# Altium PCB MB.PcbDoc
Units mm, origin at the board's own origin, x right, y up, seen from the top; angles counter-clockwise.
Board outline 160 x 154 mm, 2 copper layers (Top Layer, Bottom Layer); 49 components, 74 nets, 365 pads, 12 vias.
Unrouted connection lines stored in the file: 115.
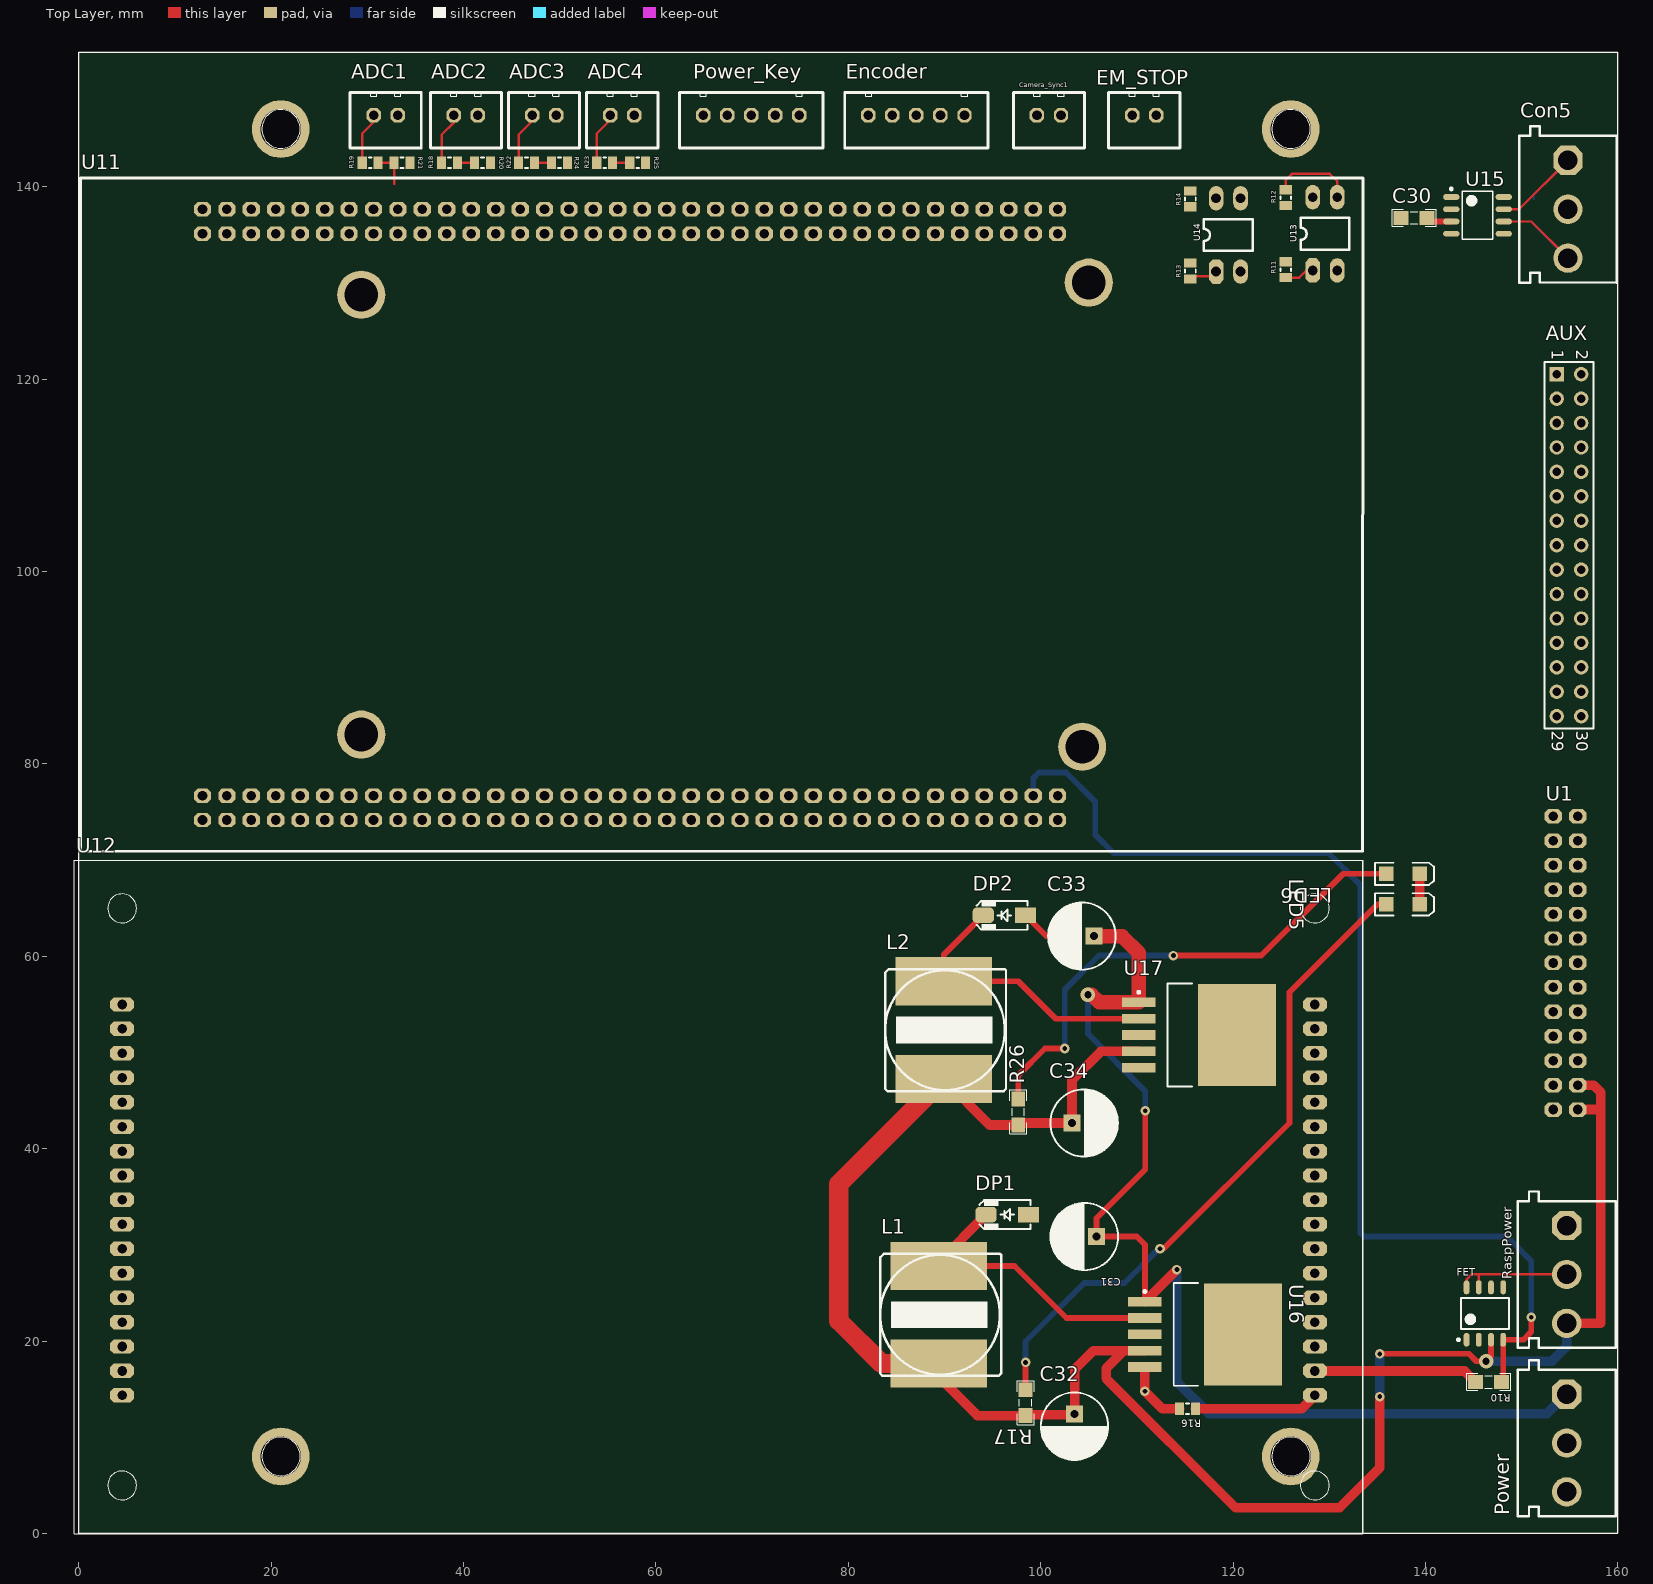
[diagram p0: Top Layer view]
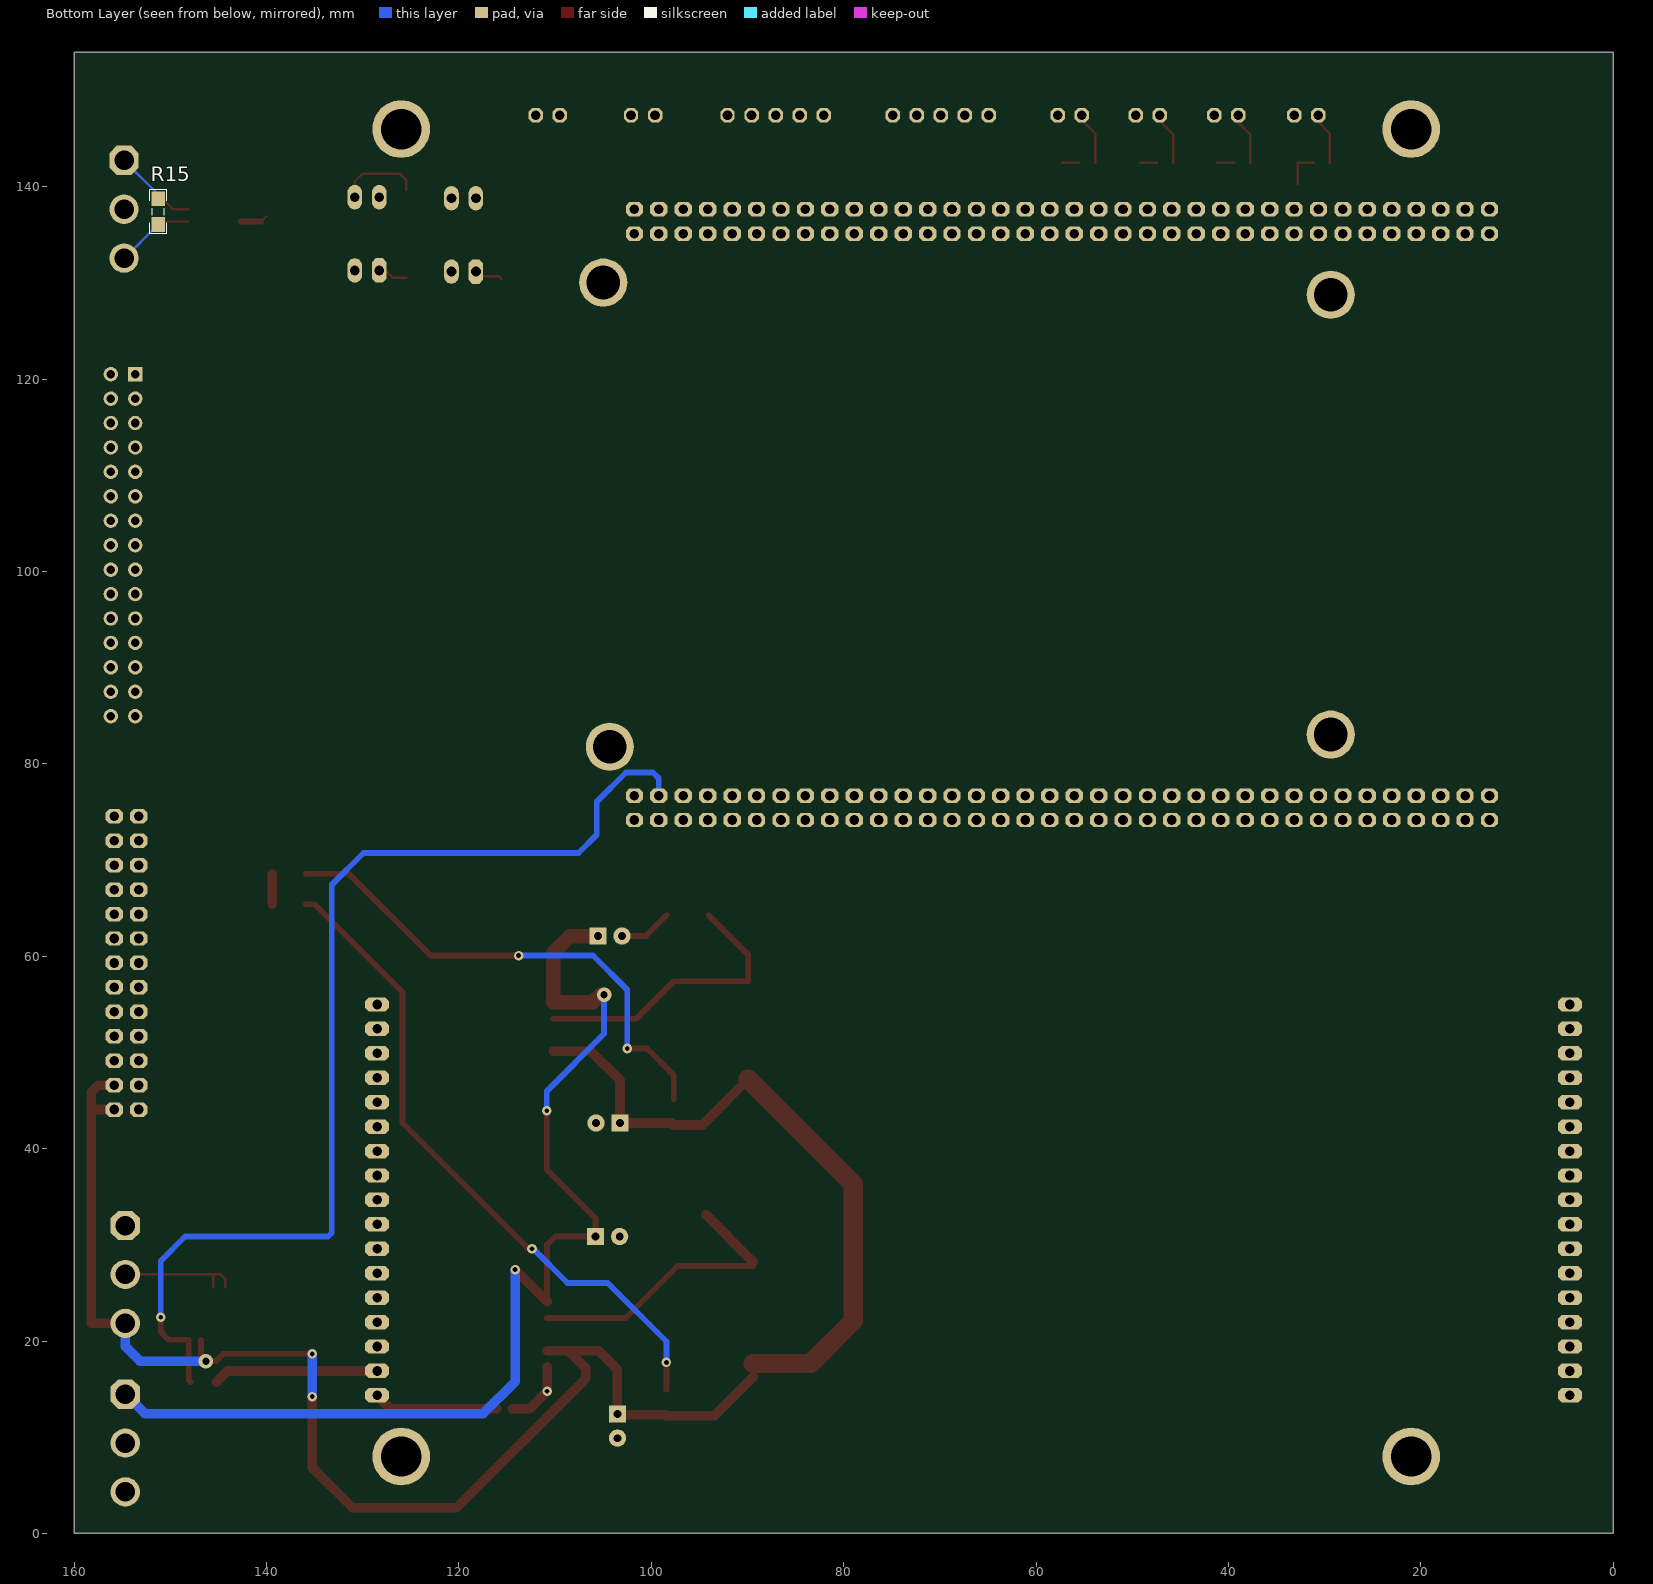
[diagram p1: Bottom Layer view, seen from below]

## Layer stack, top to bottom
Top Solder: solder mask 0.0102, Solder Resist, Dk 3.5
Top Layer: signal copper 0.0356
Dielectric 1: dielectric 0.32, FR-4, Dk 4.8
Bottom Layer: signal copper 0.0356
Bottom Solder: solder mask 0.0102, Solder Resist, Dk 3.5

## Board outline
0.013,0.013 0.013,154.013 160.013,154.013 160.013,0.013

## Design rules (kind name [scope] priority, off if disabled: settings)
Clearance [All] p1: gap=0.254 ignorepadtopadclearanceinfootprint=FALSE except(0: Arc-Hole Track-Hole SMDPad-Hole THPad-Hole Via-Hole Fill-Hole Poly-Hole Region-Hole Text-Hole)
ComponentClearance [All] p1: gap=0 collisioncheckmode=3 verticalgap=2540 showdistances=FALSE
PolygonConnect [All] p1: connectstyle=Relief reliefconductorwidth=0.254 reliefentries=4 polygonreliefangle="90 Angle" airgapwidth=0.254
RoutingVias [All] p1: holewidth=0.711 width=1.27 viastyle="Through Hole" minholewidth=0.711 minwidth=1.27 maxholewidth=0.711 maxwidth=1.27
SolderMaskExpansion [All] p1: expansion=0.102
Width [All] p1: maxlimit=3 minlimit=0.254 preferedwidth=0.254
29 further rules are at their usual default settings.

## Components (designator, comment, footprint, x,y, rotation, side; value= is the part's Value field where it differs from the comment)
ADC1 "XH_2PIN" XH_2PIN 35.597,149.797 r180 top
ADC2 "XH_2PIN" XH_2PIN 43.939,149.797 r180 top
ADC3 "XH_2PIN" XH_2PIN 52.067,149.797 r180 top
ADC4 "XH_2PIN" XH_2PIN 60.195,149.797 r180 top
AUX "Header 15X2" HDR2X15 153.649,120.523 r270 top
C30 "0.1uF" CAPC3413X12N 138.811,136.779 r0 top
C31 "100uF50V" "Cap electrolitic radial 6x7-2.5" 104.541,30.861 r180 top
C32 "100uF50V" "Cap electrolitic radial 6x7-2.5" 103.505,11.156 r270 top
C33 "100uF50V" "Cap electrolitic radial 6x7-2.5" 104.287,62.103 r180 top
C34 "100uF50V" "Cap electrolitic radial 6x7-2.5" 104.501,42.672 r0 top
Camera_Sync1 "XH_2PIN" XH_2PIN 104.558,149.797 r180 top
Con5 "CON3 pin Green" My_CN3 159.906,145.275 r270 top
DP1 "1N5819" 430X270D 96.52,33.147 r180 top
DP2 "1N5819" 430X270D 96.225,64.262 r180 top
EM_STOP "XH_2PIN" XH_2PIN 114.464,149.797 r180 top
Encoder "XH_5PIN" XH_5PIN 94.525,149.797 r180 top
FET "FET_20V_6A" FET_20V_6A 146.177,22.86 r90 top
L1 "Inductor" _INDUCTOR-SMD-13.0mm 89.535,22.733 r270 top value=10uH
L2 "Inductor" _INDUCTOR-SMD-13.0mm 90.043,52.324 r270 top value=10uH
LED5 "Red" "LED SMD 1206" 137.668,65.405 r0 top
LED6 "Red" "LED SMD 1206" 137.668,68.58 r0 top
Power "CON3 pin Green" My_CN3 159.779,17.005 r270 top (schematic designator Con6)
Power_Key "XH_5PIN" XH_5PIN 77.347,149.797 r180 top
R10 "1K" RESC3413X04N 146.558,15.748 r0 top
R11 "470" "RES 0805 (2012X06L)" 125.476,130.556 r90 top
R12 "4.7k" "RES 0805 (2012X06L)" 125.476,139.699 r270 top
R13 "470" "RES 0805 (2012X06L)" 115.57,130.43 r90 top
R14 "4.7k" "RES 0805 (2012X06L)" 115.57,139.572 r270 top
R15 "120" RESC3413X04N 151.257,137.414 r90 bottom
R16 "4.7k" "RES 0805 (2012X06L)" 116.078,12.954 r180 top
R17 "1K" RESC3413X04N 98.425,13.589 r270 top
R18 "470" "RES 0805 (2012X06L)" 39.37,142.494 r180 top
R19 "470" "RES 0805 (2012X06L)" 31.114,142.494 r180 top
R20 "470" "RES 0805 (2012X06L)" 42.798,142.494 r180 top
R21 "470" "RES 0805 (2012X06L)" 34.417,142.494 r180 top
R22 "470" "RES 0805 (2012X06L)" 47.371,142.494 r180 top
R23 "470" "RES 0805 (2012X06L)" 55.498,142.494 r180 top
R24 "470" "RES 0805 (2012X06L)" 50.799,142.494 r180 top
R25 "470" "RES 0805 (2012X06L)" 58.928,142.494 r180 top
R26 "1K" RESC3413X04N 97.663,43.815 r270 top
RaspPower "CON3 pin Green" My_CN3 159.779,34.531 r270 top (schematic designator Con?)
U1 "5Inch_HDMI_DISPLAY" 5Inch_HDMI_DISPLAY 155.821,44.069 r90 top
U11 "F7" F7 0.247,140.793 r270 top locked
U12 "CAN_CARD" CAN_CARD 133.505,69.991 r180 top locked
U13 "Optoisolator" My_opto 128.27,131.318 r90 top
U14 "Optoisolator" My_opto 118.224,131.204 r90 top
U15 "TJA1051" SO-8N 145.415,137.033 r0 top
U16 "5V" _TO263 117.081,20.701 r0 top
U17 "5V" _TO263 116.446,51.816 r0 top

## Footprints (in the part's own frame and the unit in brackets; to place one, negate y for a bottom-side part, rotate by r counter-clockwise, add the part's x,y. Pads: shape width x height; smd on the part's side, far side on the other; paste and mask are expansions set on the pad)
5Inch_HDMI_DISPLAY [mm]
  oct 1.5x1.8 hole 1: 1(0,0) 2(2.54,0) 3(5.08,0) 4(7.62,0) 5(10.16,0) 6(12.7,0) 7(15.24,0) 8(17.78,0) 9(20.32,0) 10(22.86,0) 11(25.4,0) 12(27.94,0) 13(30.48,0) 14(0,2.54) 15(2.54,2.54) 16(5.08,2.54) 17(7.62,2.54) 18(10.16,2.54) 19(12.7,2.54) 20(15.24,2.54) 21(17.78,2.54) 22(20.32,2.54) 23(22.86,2.54) 24(25.4,2.54) 25(27.94,2.54) 26(30.48,2.54)
430X270D [mm] "SMA Molded Diode, 2-Leads, Body 4.3x2.7mm"
  rect 2.2x1.6 smd: 1(-2.2,0)
  rrect50% 2.2x1.6 smd: 2(2.2,0)
  silkscreen extent -2.4,-1.5 2.9,1.5, body extent -2.75,-1.4 2.75,1.4, height 2.6
_INDUCTOR-SMD-13.0mm [mm]
  rect 5x10 smd: 1(-5.08,-0.127) 2(5.08,-0.127)
  silkscreen extent -6.35,-6.22 6.35,6.35
_TO263 [mm] "D2-PAK, 6-Leads, Body 8.9x10.2mm, Pitch 1.7mm, Lead Span 15.2mm, IPC High Density"
  rect 3.5x1 smd: 1(-6.25,3.4) 2(-6.25,1.7) 3(-6.25,0) 4(-6.25,-1.7) 5(-6.25,-3.4)
  rect 8.1x10.6 smd: 6(3.95,0)
  silkscreen extent -6.37,-5.35 -0.7,5.35
CAN_CARD [mm]
  oct 2.5x1.5 hole 1: 1(5,15) 2(5,17.54) 3(5,20.08) 4(5,22.62) 5(5,25.16) 6(5,27.7) 7(5,30.24) 8(5,32.78) 9(5,35.32) 10(5,37.86) 11(5,40.4) 12(5,42.94) 13(5,45.48) 14(5,48.02) 15(5,50.56) 16(5,53.1) 17(5,55.64) 18(129,15) 19(129,17.54) 20(129,20.08) 21(129,22.62) 22(129,25.16) 23(129,27.7) 24(129,30.24) 25(129,32.78) 26(129,35.32) 27(129,37.86) 28(129,40.4) 29(129,42.94) 30(129,45.48) 31(129,48.02) 32(129,50.56) 33(129,53.1) 34(129,55.64)
  silkscreen extent 0.01,0.01 134.01,70.01
"Cap electrolitic radial 6x7-2.5" [mm] "Cap electrolitic radial 6x7-2.5-Design:Abbas Basereh"
  rect 1.8x1.8 hole 0.8: 1(-1.25,0)
  round 1.8 hole 0.8: 2(1.25,0)
  silkscreen extent -3.5,-3.5 3.6,3.5, body extent -3,-3 3,3, height 7.3
CAPC3413X12N [mm] "Chip Capacitor, 2-Leads, Body 3/40x1/30mm, IPC Medium Density-Design:Abbas Basereh"
  rect 1.55x1.45 smd: 1(-1.35,0) 2(1.35,0)
  silkscreen extent -2.29,-0.89 2.29,0.89, body extent -1,-0.62 1,0.63, height 0.78
F7 [mm]
  oct 1.5x1.8 hole 1: 1(3.125,12.605) 2(5.665,12.605) 3(3.125,15.145) 4(5.665,15.145) 5(3.125,17.685) 6(5.665,17.685) 7(3.125,20.225) 8(5.665,20.225) 9(3.125,22.765) 10(5.665,22.765) 11(3.125,25.305) 12(5.665,25.305) 13(3.125,27.845) 14(5.665,27.845) 15(3.125,30.385) 16(5.665,30.385) 17(3.125,32.925) 18(5.665,32.925) 19(3.125,35.465) 20(5.665,35.465) 21(3.125,38.005) 22(5.665,38.005) 23(3.125,40.545) 24(5.665,40.545) 25(3.125,43.085) 26(5.665,43.085) 27(3.125,45.625) 28(5.665,45.625) 29(3.125,48.165) 30(5.665,48.165) 31(3.125,50.705) 32(5.665,50.705) 33(3.125,53.245) 34(5.665,53.245) 35(3.125,55.785) 36(5.665,55.785) 37(3.125,58.325) 38(5.665,58.325) 39(3.125,60.865) 40(5.665,60.865) 41(3.125,63.405) 42(5.665,63.405) 43(3.125,65.945) 44(5.665,65.945) 45(3.125,68.485) 46(5.665,68.485) 47(3.125,71.025) 48(5.665,71.025) 49(3.125,73.565) 50(5.665,73.565) 51(3.125,76.105) 52(5.665,76.105) 53(3.125,78.645) 54(5.665,78.645) 55(3.125,81.185) 56(5.665,81.185) 57(3.125,83.725) 58(5.665,83.725) 59(3.125,86.265) 60(5.665,86.265) 61(3.125,88.805) 62(5.665,88.805) 63(3.125,91.345) 64(5.665,91.345) 65(3.125,93.885) 66(5.665,93.885) 67(3.125,96.425) 68(5.665,96.425) 69(3.125,98.965) 70(5.665,98.965) 71(3.125,101.505) 72(5.665,101.505) 73(64.085,12.605) 74(66.625,12.605) 75(64.085,15.145) 76(66.625,15.145) 77(64.085,17.685) 78(66.625,17.685) 79(64.085,20.225) 80(66.625,20.225) 81(64.085,22.765) 82(66.625,22.765) 83(64.085,25.305) 84(66.625,25.305) 85(64.085,27.845) 86(66.625,27.845) 87(64.085,30.385) 88(66.625,30.385) 89(64.085,32.925) 90(66.625,32.925) 91(64.085,35.465) 92(66.625,35.465) 93(64.085,38.005) 94(66.625,38.005) 95(64.085,40.545) 96(66.625,40.545) 97(64.085,43.085) 98(66.625,43.085) 99(64.085,45.625) 100(66.625,45.625) 101(64.085,48.165) 102(66.625,48.165) 103(64.085,50.705) 104(66.625,50.705) 105(64.085,53.245) 106(66.625,53.245) 107(64.085,55.785) 108(66.625,55.785) 109(64.085,58.325) 110(66.625,58.325) 111(64.085,60.865) 112(66.625,60.865) 113(64.085,63.405) 114(66.625,63.405) 115(64.085,65.945) 116(66.625,65.945) 117(64.085,68.485) 118(66.625,68.485) 119(64.085,71.025) 120(66.625,71.025) 121(64.085,73.565) 122(66.625,73.565) 123(64.085,76.105) 124(66.625,76.105) 125(64.085,78.645) 126(66.625,78.645) 127(64.085,81.185) 128(66.625,81.185) 129(64.085,83.725) 130(66.625,83.725) 131(64.085,86.265) 132(66.625,86.265) 133(64.085,88.805) 134(66.625,88.805) 135(64.085,91.345) 136(66.625,91.345) 137(64.085,93.885) 138(66.625,93.885) 139(64.085,96.425) 140(66.625,96.425) 141(64.085,98.965) 142(66.625,98.965) 143(64.085,101.505) 144(66.625,101.505)
  round 5 hole 3.5: ""(10.745,104.745) ""(12.015,29.115) ""(57.735,29.115) ""(59.005,104.065)
  silkscreen extent -0.13,-0.1 69.88,133.24
FET_20V_6A [mm] "SOIC, 8-Leads, Body 4.89x3.90mm, Pitch 1.27mm, IPC Medium Density"
  oval 1.45x0.6 smd: 1(-2.725,1.905) 2(-2.725,0.635) 3(-2.725,-0.635) 4(-2.725,-1.905) 5(2.725,-1.905) 6(2.725,-0.635) 7(2.725,0.635) 8(2.725,1.905)
  silkscreen extent -2.85,-2.5 1.6,2.88, body extent -2,-2.5 2,2.5, height 1.75
HDR2X15 [mm] "Connector; Header; 15x2 Position"
  rect 1.5x1.5 hole 0.9: 1(0,0)
  round 1.5 hole 0.9: 2(0,2.54) 3(2.54,0) 4(2.54,2.54) 5(5.08,0) 6(5.08,2.54) 7(7.62,0) 8(7.62,2.54) 9(10.16,0) 10(10.16,2.54) 11(12.7,0) 12(12.7,2.54) 13(15.24,0) 14(15.24,2.54) 15(17.78,0) 16(17.78,2.54) 17(20.32,0) 18(20.32,2.54) 19(22.86,0) 20(22.86,2.54) 21(25.4,0) 22(25.4,2.54) 23(27.94,0) 24(27.94,2.54) 25(30.48,0) 26(30.48,2.54) 27(33.02,0) 28(33.02,2.54) 29(35.56,0) 30(35.56,2.54)
  silkscreen extent -1.27,-1.27 36.83,3.81
"LED SMD 1206" [mm]
  rect 1.5x1.5 smd: 1(-1.75,0) 2(1.75,0)
  silkscreen extent -2.9,-1.15 3.2,1.15, body extent -1.65,-0.76 1.65,0.69, height 1.36
My_CN3 [mil]
  oct 120x120 hole 80: 1(99.5,-200.5)
  round 120 hole 80: 2(299.5,-200.5) 3(499.5,-200.5)
  silkscreen extent -40,-400 600,0
My_opto [mil]
  oct 100x60 hole 40: 1(-0.5,-0.5)
  oval 100x60 hole 40: 2(-0.5,-100.5) 3(299.5,-0.5) 4(299.5,-100.5)
  silkscreen extent 84,-150 214,50
"RES 0805 (2012X06L)" [mm] "Chip Resistor, 2-Leads, Body 2.0x1.3mm, IPC High Density _ (0.100 W)"
  rect 0.95x1.3 smd: 1(0,0) 2(1.65,0)
  silkscreen extent 0.67,-0.55 0.97,0.55, body extent -0.19,-0.63 1.84,0.64, height 0.6
RESC3413X04N [mm] "Chip Resistor, 2-Leads, Body 3/40x1/30mm, IPC Medium Density-Design:Abbas Basereh"
  rect 1.55x1.45 smd: 1(-1.35,0) 2(1.35,0)
  silkscreen extent -2.29,-0.89 2.29,0.89, body extent -1.25,-0.62 1.25,0.62, height 0.79
SO-8N [mm] "SOIC, 8-Leads, Body 4/89x3/90mm, Pitch 1/27mm, IPC Medium Density designer:abbas basereh"
  oval 1.7x0.6 smd mask+0.06: 1(-2.725,1.905) 2(-2.725,0.635) 3(-2.725,-0.635) 4(-2.725,-1.905) 5(2.725,-1.905) 6(2.725,-0.635) 7(2.725,0.635) 8(2.725,1.905)
  silkscreen extent -2.85,-2.5 1.6,2.88, body extent -3,-2.5 3,2.5, height 1.5
XH_2PIN [mm]
  oct 1.5x1.5 hole 1: 1(2.45,2.35) 2(4.95,2.35)
  silkscreen extent 0,0 7.4,5.75
XH_5PIN [mm]
  oct 1.5x1.5 hole 1: 1(2.45,2.35) 2(4.95,2.35) 3(7.45,2.35) 4(9.95,2.35) 5(12.45,2.35)
  silkscreen extent 0,0 14.9,5.75

## Part data
AUX: "Header, 15-Pin, Dual row", LatestRevisionDate=17-Jul-2002, LatestRevisionNote="Re-released for DXP Platform.", Publisher="Altium Limited"
C30: library part "CAP SMD 0805", "CAP 0805", Data=16-12-2016, Desc.="CAP SMD 0805", Designer="Abbas Basereh"
C31 C32 C33 C34: library part "Cap ELECTROLITIC TOTAL SIZE", "Cap electrolitic radial", Data=16-12-2016, Designer="Abbas Basereh"
Con5 Power RaspPower: "Connector green screw"
DP1 DP2: "Schottkey Rectifiers", Data=16-12-2016, Designer="Abbas Basereh"
LED5 LED6: library part LED, "LED", Adding Date=1387/12/22, Color=Red, Designer="Saeid Jorablo", Organazation=ControTec, Size="SMD 1206"
R10 R15 R17 R26: library part "RES 0805 0.125W", "RES 0805", Data=16-12-2016, Desc.="RES SMD 0805", Designer="Abbas Basereh"
R11 R12 R13 R14 R16 R18 R19 R20 R21 R22 R23 R24 R25: library part Resistor, "Resistor"
U16 U17: library part LM2576, "Buck Step Down Regulator with 4.75 to 60 V Input and 15 V Output, -40 to 125 degC, 5-Pin DDPAK/TO-263 (KTT), Green (RoHS & no Sb/Br)"

## Free pads (board coordinates)
  round 6 hole 4.2: ""(21,8) ""(21,146) ""(126,8) ""(126,146)

## Via types
v1: diameter 1, hole 0.5, Top Layer to Bottom Layer, 10 vias
v2: diameter 1.5, hole 0.75, Top Layer to Bottom Layer, 2 vias

## Nets (pads, with @x,y where several pads share a name; then routed paths per layer and width w, separated by ;. In a path a pad name is that pad's centre, name@x,y a point inside that pad or via, vN(x,y) a via of type N, cw(c..) or ccw(c..) an arc to the next point about the centre after c; other vN are vias at no path point)
+5: C30.2 Encoder.3 R10.1 R16.1 U12.12 U12.13 U12.14 U12.15 U12.16 U12.17 U13.3 U14.3 U15.3 | length 33
  Top Layer w0.254: C30.2@140.034,136.906 C30.2 C30.2@140.542,136.398
  Top Layer w0.6: C30.2@140.542,136.398 U15.3
  Top Layer w1: R16.1 127.108,12.954 U12.17 ; U12.16 144.065,16.891 R10.1
+12V: C31.1 C33.1 Power.1 U16.1 U17.1 | length 116.3
  Top Layer w0.6: U16.1 110.831,30.012 109.982,30.861 C31.1 105.791,32.766 110.871,37.846 v1(110.871,43.942)
  Top Layer w1: U16.1 v1(114.162,27.432)
  Top Layer w1.5: v2(104.902,56.007) 105.283,56.007 106.074,55.216 U17.1 110.196,60.365 108.458,62.103 C33.1
  Bottom Layer w0.6: v2(104.902,56.007) 104.902,51.943 110.871,45.974 v1(110.871,43.942)
  Bottom Layer w1: v1(114.162,27.432) 114.162,15.759 117.475,12.446 152.654,12.446 Power.1
ADC1_IN0: R19.1 R21.2 U11.46 | length 3.8
  Top Layer w0.254: R19.1 R21.2 32.767,140.334
ADC1_IN3: R18.1 R20.2 U11.107 | length 1.8
  Top Layer w0.254: R18.1 R20.2
ADC1_IN9: R23.1 R25.2 U11.122 | length 1.8
  Top Layer w0.254: R23.1 R25.2
ADC1_IN10: R22.1 R24.2 U11.36 | length 1.8
  Top Layer w0.254: R22.1 R24.2
AUX_GPIO1: AUX.13 U11.142
AUX_GPIO2: AUX.14 U11.143
AUX_GPIO3: AUX.15 U11.144
AUX_GPIO4: AUX.16 U11.125
AUX_GPIO5: AUX.17 U11.32
AUX_GPIO6: AUX.18 U11.30
BL_EN: FET.4 R10.2 U11.141 | length 113.2
  Top Layer w0.6: R10.2 148.082,15.922 FET.4 150.183,20.135 151.003,20.955 v1(151.003,22.479)
  Bottom Layer w0.6: U11.141 99.212,78.511 99.822,79.121 102.616,79.121 105.664,76.073 105.664,72.644 107.569,70.739 129.921,70.739 133.223,67.437 133.223,31.242 133.604,30.861 148.463,30.861 151.003,28.321 v1(151.003,22.479)
BL_PW: FET.7 FET.8 RaspPower.2 | length 12.8
  Top Layer w0.254: FET.8 144.272,26.416 144.78,26.924 145.542,26.924 ; FET.7 145.542,26.924 ; RaspPower.2 145.542,26.924
CAM_SYNC: R14.1 U11.33 U14.4
CAN1_RX: U11.15 U15.4
CAN1_TX: U11.17 U15.1
CS1: U11.97 U12.21
CS2: U11.96 U12.20
CS3: U11.85 U12.19
CS4: U11.108 U12.18
EM_STOP: R12.1 U11.16 U13.4 | length 8.6
  Top Layer w0.254: R12.1 125.476,140.716 126.111,141.351 130.048,141.351 130.823,140.576 U13.4
GND: ADC1.1 ADC2.1 ADC3.1 ADC4.1 AUX.23 AUX.25 AUX.27 AUX.29 C30.1 C31.2 C32.2 C33.2 C34.2 Con5.2 DP1.1 DP2.1 Encoder.1 Encoder.2 LED5.2 LED6.2 pad.@126,146 Power.2 Power_Key.1 R12.2 R14.2 R20.1 R21.1 R24.1 R25.1 RaspPower.1 U1.3 U1.7 U1.10 U1.18 U1.26 U12.5 U12.6 U12.7 U12.8 U12.9 U12.10 U15.2 U16.3 U16.6 U17.3 U17.5 U17.6 | length 8.7
  Top Layer w0.6: DP2.1 100.584,62.103 C33.2
  Top Layer w1: LED5.2 LED6.2
I2C_SCL: AUX.19 U11.21
I2C_SDA: AUX.20 U11.19
NetADC1_2: ADC1.2 R19.2 | length 5.4
  Top Layer w0.254: R19.2 29.464,145.542 30.607,146.685 30.607,147.407 ADC1.2
NetADC2_2: ADC2.2 R18.2 | length 5.5
  Top Layer w0.254: R18.2 37.72,145.416 38.989,146.685 ADC2.2
NetADC3_2: ADC3.2 R22.2 | length 5.5
  Top Layer w0.254: R22.2 45.721,145.416 47.117,146.812 ADC3.2
NetADC4_2: ADC4.2 R23.2 | length 5.5
  Top Layer w0.254: R23.2 53.848,145.542 55.245,146.939 ADC4.2
NetCamera_Sync1_1: Camera_Sync1.1 R13.2
NetCamera_Sync1_2: Camera_Sync1.2 U14.2
NetCon5_1: Con5.1 R15.2 U15.7 | length 14.2
  Top Layer w0.254: U15.7 149.733,137.668 Con5.1
  Bottom Layer w0.254: R15.2 151.257,139.192 Con5.1
NetCon5_3: Con5.3 R15.1 U15.6 | length 13.2
  Top Layer w0.254: U15.6 151.003,136.398 Con5.3
  Bottom Layer w0.254: R15.1 154.733,132.588 Con5.3
NetDP1_2: DP1.2 L1.1 U16.2 | length 31
  Top Layer w0.6: L1.1@89.408,28.235 L1.1 97.282,27.813 102.694,22.401 U16.2
  Top Layer w1: L1.1@89.408,28.235 DP1.2
NetDP2_2: DP2.2 L2.1 U17.2 | length 30.5
  Top Layer w0.6: DP2.2 89.916,60.153 L2.1 97.663,57.404 101.551,53.516 U17.2
NetEM_STOP_1: EM_STOP.1 R11.2
NetEM_STOP_2: EM_STOP.2 U13.2
NetLED5_1: LED5.1 R17.1 | length 69.3
  Top Layer w0.6: R17.1 v1(98.425,17.78) ; v1(112.395,29.591) 112.776,29.591 125.857,42.672 125.857,56.261 135.001,65.405 LED5.1
  Bottom Layer w0.6: v1(98.425,17.78) 98.425,19.939 104.521,26.035 108.712,26.035 112.268,29.591 v1(112.395,29.591)
NetLED6_1: LED6.1 R26.1 | length 53
  Top Layer w0.6: R26.1 97.663,47.625 100.457,50.419 v1(102.489,50.419) ; v1(113.792,60.071) 122.936,60.071 131.445,68.58 LED6.1
  Bottom Layer w0.6: v1(102.489,50.419) 102.489,56.515 106.045,60.071 v1(113.792,60.071)
NetR11_1: R11.1 U13.1 | length 3.1
  Top Layer w0.254: R11.1 126.873,130.556 127.622,131.305 U13.1
NetR13_1: R13.1 U14.1 | length 3
  Top Layer w0.254: R13.1 115.823,130.683 117.729,130.683 U14.1
RPi_5V: AUX.24 AUX.26 AUX.28 AUX.30 C32.1 C34.1 FET.3 L1.2 L2.2 Power_Key.2 R17.2 R26.2 RaspPower.3 U1.1 U1.2 U16.4 U17.4 | length 209.2
  Top Layer w0.6: L1.2@89.408,16.256 L1.2 ; R26.2 R26.2@97.87,42.672 ; R17.2 R17.2@98.505,12.319 ; v1(135.255,18.669) 144.526,18.669 145.288,17.907 v2(146.304,17.907) 146.812,18.415 FET.3
  Top Layer w1: L1.2@89.408,16.256 93.425,12.239 R17.2 ; L2.2 94.695,42.465 R26.2 ; R26.2@97.87,42.672 C34.1 103.251,47.117 106.25,50.116 U17.4 ; R17.2@98.505,12.319 103.525,12.319 103.525,17.038 105.488,19.001 108.663,19.001 ; U16.4 108.663,19.001 ; v1(135.255,14.224) 135.255,6.858 131.064,2.667 120.269,2.667 106.807,16.129 106.807,17.145 108.663,19.001 ; RaspPower.3 158.242,21.844 158.242,43.942 ; U1.1 158.115,44.069 158.242,43.942 ; U1.2 157.48,46.609 158.242,45.847 158.242,43.942
  Top Layer w2: L1.2 83.439,17.653 78.994,22.098 78.994,36.322 L2.2
  Bottom Layer w1: v1(135.255,14.224) v1(135.255,18.669) ; v2(146.304,17.907) 153.162,17.907 154.686,19.431 RaspPower.3
RPi_PW_EN: R16.2 U11.29 U16.5 | length 6.9
  Top Layer w1: U16.5 v1(110.831,14.772) 112.649,12.954 R16.2
RPi_SPW: U1.15 U11.27
SPI1_MISO: U1.24 U11.131
SPI1_MOSI: U1.23 U11.115
SPI1_NSS: U1.12 U11.42
SPI1_SCK: U1.25 U11.133
SPI2_MISO: U11.37 U12.23
SPI2_MOSI: U11.35 U12.24
SPI2_SCK: U11.119 U12.22
SPI3_MISO: AUX.1 U11.72
SPI3_MOSI: AUX.3 U11.124
SPI3_NSS: AUX.7 U11.55
SPI3_SCK: AUX.5 U11.71
SPI4_MISO: AUX.2 U11.24
SPI4_MOSI: AUX.4 U11.12
SPI4_NSS: AUX.8 U11.26
SPI4_SCK: AUX.6 U11.28
SYNC1: U11.75 U12.25
SYNC2: U11.78 U12.26
TIM1_CH1: AUX.9 U11.94
TIM1_CH2: AUX.10 U11.90
TIM1_CH3: AUX.11 U11.89
TIM1_CH4: AUX.12 U11.93
TIM2_CH4: Power_Key.3 U11.128
TIM3_CH1: Power_Key.4 U11.117
TIM4_CH1: Encoder.4 U11.101
TIM4_CH2: Encoder.5 U11.103
TIM14_CH1: Power_Key.5 U11.18
UART5_RX: AUX.21 U11.70
UART5_TX: AUX.22 U11.69
UART7_RX: U1.4 U11.63
UART7_TX: U1.5 U11.61
pads on no net: FET.1 FET.2 FET.5 FET.6 Power.3 U1.6 U1.8 U1.9 U1.11 U1.13 U1.14 U1.16 U1.17 U1.19 U1.20 U1.21 U1.22 U11. U11.1 U11.2 U11.3 U11.4 U11.5 U11.6 U11.7 U11.8 U11.9 U11.10 U11.11 U11.13 U11.14 U11.20 U11.22 U11.23 U11.25 U11.31 U11.34 U11.38 U11.39 U11.40 U11.41 U11.43 U11.44 U11.45 U11.47 U11.48 U11.49 U11.50 U11.51 U11.52 U11.53 U11.54 U11.56 U11.57 U11.58 U11.59 U11.60 U11.62 U11.64 U11.65 U11.66 U11.67 U11.68 U11.73 U11.74 U11.76 U11.77 U11.79 U11.80 U11.81 U11.82 U11.83 U11.84 U11.86 U11.87 U11.88 U11.91 U11.92 U11.95 U11.98 U11.99 U11.100 U11.102 U11.104 U11.105 U11.106 U11.109 U11.110 U11.111 U11.112 U11.113 U11.114 U11.116 U11.118 U11.120 U11.121 U11.123 U11.126 U11.127 U11.129 U11.130 U11.132 U11.134 U11.135 U11.136 U11.137 U11.138 U11.139 U11.140 U12.1 U12.2 U12.3 U12.4 U12.11 U12.27 U12.28 U12.29 U12.30 U12.31 U12.32 U12.33 U12.34 U15.5 U15.8

## Silkscreen, mask and mechanical layers (free items; w line width, h text height)
Top Overlay:
  circle w0.025: c21.013,8.013 r2
  circle w0.025: c126.013,8.013 r2
  circle w0.025: c126.013,146.013 r2
  circle w0.025: c21.013,146.013 r2
  lines w0.025: 0.013,0.013 160.013,0.013 160.013,154.013 0.013,154.013 0.013,0.013 ; 0.013,0.013 133.513,0.013 133.513,70.013 0.013,70.013 0.013,0.013 ; 0.013,71.013 133.513,71.013 133.513,141.013 0.013,141.013 0.013,71.013

## Text inside footprints (layer, text, board x,y; h text height)
AUX: Top Overlay "1" at 153.141,123.063 h1.27 r270; Top Overlay "2" at 155.681,123.063 h1.27 r270; Top Overlay "29" at 153.141,83.439 h1.27 r270; Top Overlay "30" at 155.681,83.439 h1.27 r270